# Altium PCB FreshPal PCB.PcbDoc
Units mil, origin at the board's own origin, x right, y up, seen from the top; angles counter-clockwise.
Board outline 2555 x 1245 mil, 2 copper layers (Top Layer, Bottom Layer); 40 components, 27 nets, 226 pads, 61 vias.
Unrouted connection lines stored in the file: 2.
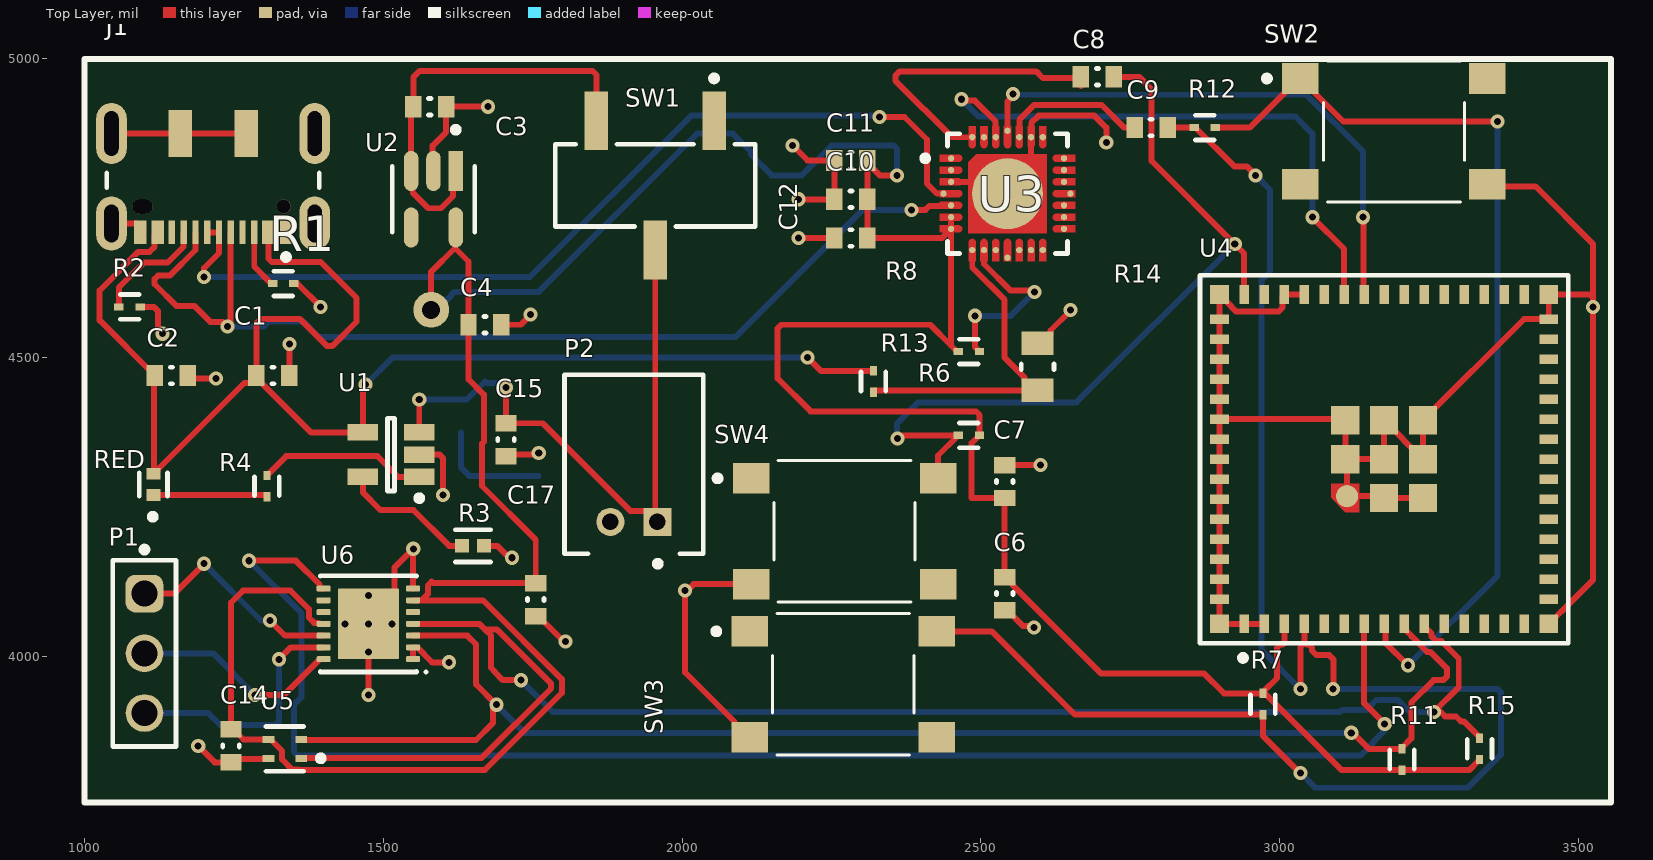
[diagram p0: Top Layer view]
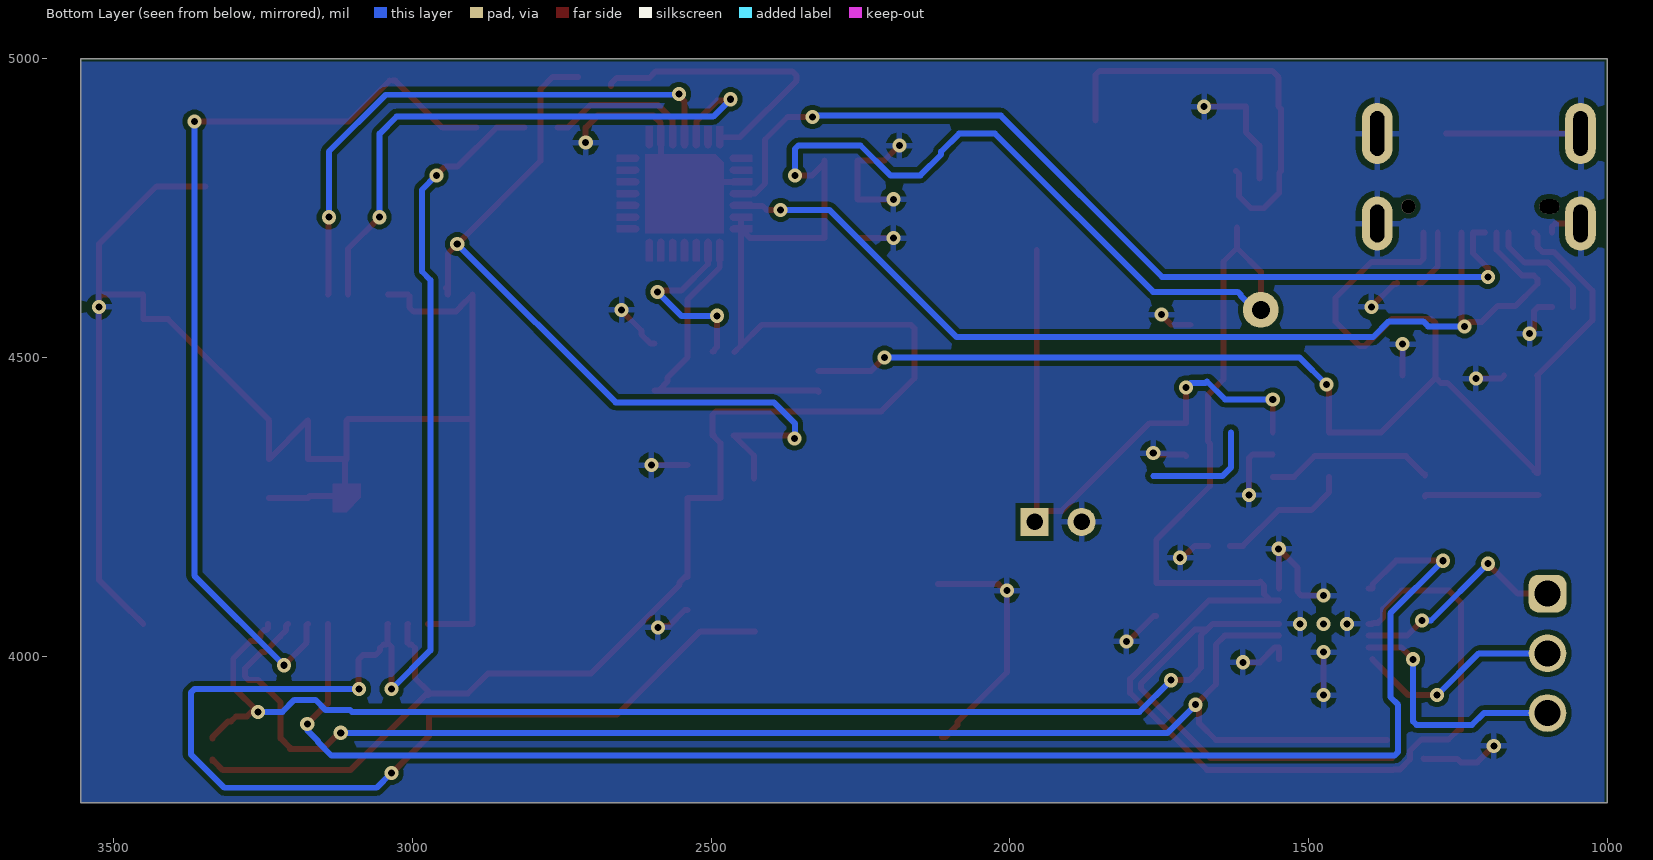
[diagram p1: Bottom Layer view, seen from below]
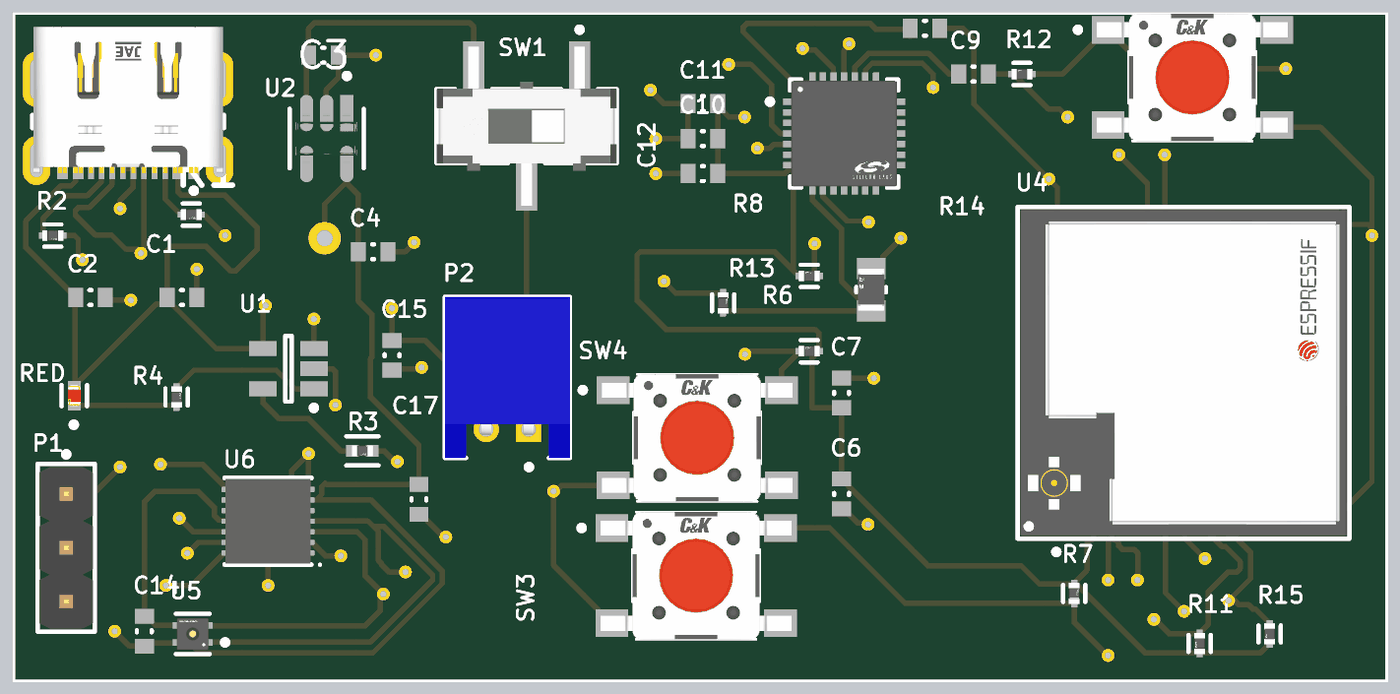
[diagram p2: 3D render of the assembled board from above, using the file's embedded part models]

## Layer stack, top to bottom
Top Solder: solder mask 0.4, Solder Resist, Dk 3.5
Top Layer: signal copper 1.4
Dielectric 1: dielectric 12.6, FR-4, Dk 4.8
Bottom Layer: signal copper 1.4
Bottom Solder: solder mask 0.4, Solder Resist, Dk 3.5

## Board outline
1000,3755 1000,5000 3555,5000 3555,3755

## Design rules (kind name [scope] priority, off if disabled: settings)
Clearance [All] p1: gap=8 ignorepadtopadclearanceinfootprint=FALSE
PolygonConnect [All] p1: connectstyle=Relief reliefconductorwidth=10 reliefentries=4 polygonreliefangle="90 Angle" airgapwidth=10
RoutingVias [All] p1: holewidth=20 width=40 viastyle="Through Hole" minholewidth=8 minwidth=18 maxholewidth=12 maxwidth=24
SolderMaskExpansion [All] p1: expansion=0 istentingtop=FALSE
SupplyNets "Schematic Supply Nets" [InNet('GND')] p1: voltage=0.000
Width [All] p1: maxlimit=10 minlimit=10 preferedwidth=10
30 further rules are at their usual default settings.

## Classes and differential pairs
component class "Frteshpal Schematic": C1 C2 C3 C4 C6 C7 C8 C9 C10 C11 C12 C14 C15 C17 J1 P1 P2 R1 R3 R4 R6 R8 R11 R12 R13 R14 R15 RED SW1 SW3 SW4 U1 U2 U3 U4 U5 U6

## Components (designator, comment, footprint, x,y, rotation, side; value= is the part's Value field where it differs from the comment)
C1 "100nF" CAPC0603(1608)100_L 1315,4470 r0 top value=3.3pF
C2 "10uF" CAPC0603(1608)100_L 1145,4470 r0 top value=3.3pF
C3 "1uF" CAPC0603(1608)100_L 1577.56,4920 r0 top value=3.3pF
C4 "10uF" CAPC0603(1608)100_L 1670,4555 r0 top value=3.3pF
C6 "10uF" CAPC0603(1608)100_L 2540,4105 r270 top value=3.3pF
C7 "100nF" CAPC0603(1608)100_L 2540,4292.56 r90 top value=3.3pF
C8 "100nF" CAPC0603(1608)100_L 2695,4970 r180 top value=3.3pF
C9 "100nF" CAPC0603(1608)100_L 2785,4885 r180 top value=3.3pF
C10 "4.7uF" CAPC0603(1608)100_L 2282.44,4765 r180 top value=3.3pF
C11 "100nF" CAPC0603(1608)100_L 2282.44,4830 r180 top value=3.3pF
C12 "100nF" CAPC0603(1608)100_L 2282.44,4700 r0 top value=3.3pF
C14 "10uF" CAPC0603(1608)100_L 1245,3850 r270 top value=3.3pF
C15 "4.7uF" CAPC0603(1608)100_L 1705,4362.56 r90 top value=3.3pF
C17 "100nF" CAPC0603(1608)100_L 1755,4095 r90 top value=3.3pF
J1 "DX07S016JA1R1500" FP-DX07S016JA1R1500-MFG 1214.88,4835.63 r180 top
P1 "61300311121" 61300311121 1100,4005 r270 top
P2 "S2B-PH-K-S(LF)(SN)" JST-S2B-PH-K-S_V 1919.37,4321.46 r180 top
R1 "5.1k" FP-RN73R1E-MFG 1332.18,4623.86 r0 top
R2 "5.1k" FP-RN73R1E-MFG 1075,4585 r0 top
R3 "2k" FP-RN73R1E-IPC_B 1650,4185 r0 top
R4 "4.7k" FP-RN73R1E-MFG 1305,4285 r90 top
R6 "10k" FP-RN73R1E-MFG 2480,4370 r180 top
R7 "10k" FP-RN73R1E-MFG 2972.01,3920.16 r90 top
R8 "1k" FP-RN73R1E-MFG 2480,4510 r180 top
R11 "4.7k" FP-RN73R1E-MFG 3205,3827.28 r270 top
R12 "10k" FP-RN73R1E-MFG 2875,4885 r180 top
R13 "22.1k" FP-RN73R1E-MFG 2320,4460 r90 top
R14 "47.5k" FP-RN732A-MFG 2595,4484.37 r90 top value=69.8KΩ
R15 "4.7k" FP-RN73R1E-MFG 3335,3845 r270 top
RED "LED 1" FP-SML-P1-MFG 1115,4287.72 r90 top
SW1 "S102011SCQN" FP-JS102011SCQN-MFG 1955,4788.27 r180 top
SW2 "" PTS645SM43SMTR92LFS_MFG 3191.5,4878.58 r0 top
SW3 "PTS645SM43SMTR92LFS" PTS645SM43SMTR92LFS_MFG 2269.78,3953.24 r0 top
SW4 "PTS645SM43SMTR92LFS" PTS645SM43SMTR92LFS_MFG 2271.89,4209.3 r0 top
U1 "MCP73831T-2ACI/OT" SOT-23-OT5_M 1512.76,4337.6 r180 top
U2 "AP2112K-3.3TRG1" FP-SOT25-IPC_A 1583.79,4765.15 r270 top
U3 "CP2102N-A02-GQFN28" FP-CP2102N-A02-GQFN28-MFG 2544.68,4774.49 r0 top
U4 "ESP32-S2-MINI-1U" FP-ESP32-S2-MINI-1U-MFG 3175.04,4330 r90 top
U5 "SHT40-AD1B-R2" FP-SHT40-AD1B-R2-MFG 1335,3845 r180 top
U6 "LMP91000SDX/NOPB" NHL0014B_V 1474.8,4054.37 r180 top

## Footprints (in the part's own frame and the unit in brackets; to place one, negate y for a bottom-side part, rotate by r counter-clockwise, add the part's x,y. Pads: shape width x height; smd on the part's side, far side on the other; paste and mask are expansions set on the pad)
61300311121 [mm] "Pin Header, pitch 2.54 mm, THT, Vertical, single row, 3p"
  rrect50% 1.6x1.6 hole 1.1: 1(-2.54,0)
  round 1.6 hole 1.1: 2(0,0) 3(2.54,0)
  silkscreen extent -4.53,-1.35 3.96,1.35, body extent -3.81,-1.27 3.81,1.27, height 8.57
CAPC0603(1608)100_L [mm] "Chip Capacitor, Body 1.6x0.8mm, Height 1.0mm, IPC High Density"
  rect 0.7x0.9 smd: 1(-0.7,0) 2(0.7,0)
  silkscreen extent -0.05,-0.35 0.05,0.35, body extent -0.87,-0.47 0.88,0.48, height 1
FP-CP2102N-A02-GQFN28-MFG [mm]
  round 0.27 smd paste+0 mask+0: 1(-2.4,1.5) 2(-2.4,1) 3(-2.4,0.5) 4(-2.725,0) 5(-2.4,-0.5) 6(-2.4,-1) 7(-2.4,-1.5) 8(-1.5,-2.4) 9(-1,-2.4) 10(-0.5,-2.4) 11(0,-2.725) 12(0.5,-2.4) 13(1,-2.4) 14(1.5,-2.4) 15(2.4,-1.5) 16(2.4,-1) 17(2.4,-0.5) 18(2.675,0) 19(2.4,0.5) 20(2.4,1) 21(2.4,1.5) 22(1.5,2.4) 23(1,2.4) 24(0.5,2.4) 25(0,2.675) 26(-0.5,2.4) 27(-1,2.4) 28(-1.5,2.4)
  round 3.015 smd paste-1000 mask+0: 29(0,0)
  Top Layer region: -2.875,-0.85 -2.075,-0.85 -2.018,-0.861 -1.969,-0.894 -1.936,-0.943 -1.925,-1 -1.925,-1 -1.936,-1.057 -1.969,-1.106 -2.018,-1.139 -2.075,-1.15 -2.075,-1.15 -2.875,-1.15
  Top Layer region: -2.875,-1.35 -2.075,-1.35 -2.018,-1.361 -1.969,-1.394 -1.936,-1.443 -1.925,-1.5 -1.925,-1.5 -1.936,-1.557 -1.969,-1.606 -2.018,-1.639 -2.075,-1.65 -2.075,-1.65 -2.875,-1.65
  Top Layer region: -0.35,2.875 -0.35,2.075 -0.361,2.018 -0.394,1.969 -0.443,1.936 -0.5,1.925 -0.5,1.925 -0.557,1.936 -0.606,1.969 -0.639,2.018 -0.65,2.075 -0.65,2.075 -0.65,2.875
  Top Layer region: 1.15,2.875 1.15,2.075 1.139,2.018 1.106,1.969 1.057,1.936 1,1.925 1,1.925 0.943,1.936 0.894,1.969 0.861,2.018 0.85,2.075 0.85,2.075 0.85,2.875
  Top Layer region: -1.675,1.325 -1.325,1.675 1.675,1.675 1.675,-1.675 -1.675,-1.675
  Top Layer region: -2.875,0.65 -2.075,0.65 -2.018,0.639 -1.969,0.606 -1.936,0.557 -1.925,0.5 -1.925,0.5 -1.936,0.443 -1.969,0.394 -2.018,0.361 -2.075,0.35 -2.075,0.35 -2.875,0.35
  Top Layer region: 0.15,2.875 0.15,2.075 0.139,2.018 0.106,1.969 0.057,1.936 0,1.925 0,1.925 -0.057,1.936 -0.106,1.969 -0.139,2.018 -0.15,2.075 -0.15,2.075 -0.15,2.875
  Top Layer region: 0.65,2.875 0.65,2.075 0.639,2.018 0.606,1.969 0.557,1.936 0.5,1.925 0.5,1.925 0.443,1.936 0.394,1.969 0.361,2.018 0.35,2.075 0.35,2.075 0.35,2.875
  Top Layer region: -1.35,2.875 -1.35,2.075 -1.361,2.018 -1.394,1.969 -1.443,1.936 -1.5,1.925 -1.5,1.925 -1.557,1.936 -1.606,1.969 -1.639,2.018 -1.65,2.075 -1.65,2.075 -1.65,2.875
  Top Layer region: -1.65,-2.875 -1.65,-2.075 -1.639,-2.018 -1.606,-1.969 -1.557,-1.936 -1.5,-1.925 -1.5,-1.925 -1.443,-1.936 -1.394,-1.969 -1.361,-2.018 -1.35,-2.075 -1.35,-2.075 -1.35,-2.875
  Top Layer region: -2.875,0.15 -2.075,0.15 -2.018,0.139 -1.969,0.106 -1.936,0.057 -1.925,0 -1.925,0 -1.936,-0.057 -1.969,-0.106 -2.018,-0.139 -2.075,-0.15 -2.075,-0.15 -2.875,-0.15
  Top Layer region: -2.875,-0.35 -2.075,-0.35 -2.018,-0.361 -1.969,-0.394 -1.936,-0.443 -1.925,-0.5 -1.925,-0.5 -1.936,-0.557 -1.969,-0.606 -2.018,-0.639 -2.075,-0.65 -2.075,-0.65 -2.875,-0.65
  Top Layer region: -2.875,1.65 -2.075,1.65 -2.018,1.639 -1.969,1.606 -1.936,1.557 -1.925,1.5 -1.925,1.5 -1.936,1.443 -1.969,1.394 -2.018,1.361 -2.075,1.35 -2.075,1.35 -2.875,1.35
  Top Layer region: -2.875,1.15 -2.075,1.15 -2.018,1.139 -1.969,1.106 -1.936,1.057 -1.925,1 -1.925,1 -1.936,0.943 -1.969,0.894 -2.018,0.861 -2.075,0.85 -2.075,0.85 -2.875,0.85
  Top Layer region: 2.875,-1.65 2.075,-1.65 2.018,-1.639 1.969,-1.606 1.936,-1.557 1.925,-1.5 1.925,-1.5 1.936,-1.443 1.969,-1.394 2.018,-1.361 2.075,-1.35 2.075,-1.35 2.875,-1.35
  Top Layer region: 2.875,-1.15 2.075,-1.15 2.018,-1.139 1.969,-1.106 1.936,-1.057 1.925,-1 1.925,-1 1.936,-0.943 1.969,-0.894 2.018,-0.861 2.075,-0.85 2.075,-0.85 2.875,-0.85
  Top Layer region: 2.875,-0.65 2.075,-0.65 2.018,-0.639 1.969,-0.606 1.936,-0.557 1.925,-0.5 1.925,-0.5 1.936,-0.443 1.969,-0.394 2.018,-0.361 2.075,-0.35 2.075,-0.35 2.875,-0.35
  Top Layer region: 2.875,-0.15 2.075,-0.15 2.018,-0.139 1.969,-0.106 1.936,-0.057 1.925,0 1.925,0 1.936,0.057 1.969,0.106 2.018,0.139 2.075,0.15 2.075,0.15 2.875,0.15
  Top Layer region: 2.875,0.35 2.075,0.35 2.018,0.361 1.969,0.394 1.936,0.443 1.925,0.5 1.925,0.5 1.936,0.557 1.969,0.606 2.018,0.639 2.075,0.65 2.075,0.65 2.875,0.65
  Top Layer region: 2.875,0.85 2.075,0.85 2.018,0.861 1.969,0.894 1.936,0.943 1.925,1 1.925,1 1.936,1.057 1.969,1.106 2.018,1.139 2.075,1.15 2.075,1.15 2.875,1.15
  Top Layer region: 2.875,1.35 2.075,1.35 2.018,1.361 1.969,1.394 1.936,1.443 1.925,1.5 1.925,1.5 1.936,1.557 1.969,1.606 2.018,1.639 2.075,1.65 2.075,1.65 2.875,1.65
  Top Layer region: -1.15,-2.875 -1.15,-2.075 -1.139,-2.018 -1.106,-1.969 -1.057,-1.936 -1,-1.925 -1,-1.925 -0.943,-1.936 -0.894,-1.969 -0.861,-2.018 -0.85,-2.075 -0.85,-2.075 -0.85,-2.875
  Top Layer region: -0.65,-2.875 -0.65,-2.075 -0.639,-2.018 -0.606,-1.969 -0.557,-1.936 -0.5,-1.925 -0.5,-1.925 -0.443,-1.936 -0.394,-1.969 -0.361,-2.018 -0.35,-2.075 -0.35,-2.075 -0.35,-2.875
  Top Layer region: -0.15,-2.875 -0.15,-2.075 -0.139,-2.018 -0.106,-1.969 -0.057,-1.936 0,-1.925 0,-1.925 0.057,-1.936 0.106,-1.969 0.139,-2.018 0.15,-2.075 0.15,-2.075 0.15,-2.875
  Top Layer region: 0.35,-2.875 0.35,-2.075 0.361,-2.018 0.394,-1.969 0.443,-1.936 0.5,-1.925 0.5,-1.925 0.557,-1.936 0.606,-1.969 0.639,-2.018 0.65,-2.075 0.65,-2.075 0.65,-2.875
  Top Layer region: 0.85,-2.875 0.85,-2.075 0.861,-2.018 0.894,-1.969 0.943,-1.936 1,-1.925 1,-1.925 1.057,-1.936 1.106,-1.969 1.139,-2.018 1.15,-2.075 1.15,-2.075 1.15,-2.875
  Top Layer region: 1.35,-2.875 1.35,-2.075 1.361,-2.018 1.394,-1.969 1.443,-1.936 1.5,-1.925 1.5,-1.925 1.557,-1.936 1.606,-1.969 1.639,-2.018 1.65,-2.075 1.65,-2.075 1.65,-2.875
  Top Layer region: 1.65,2.875 1.65,2.075 1.639,2.018 1.606,1.969 1.557,1.936 1.5,1.925 1.5,1.925 1.443,1.936 1.394,1.969 1.361,2.018 1.35,2.075 1.35,2.075 1.35,2.875
  Top Layer region: -0.85,2.875 -0.85,2.075 -0.861,2.018 -0.894,1.969 -0.943,1.936 -1,1.925 -1,1.925 -1.057,1.936 -1.106,1.969 -1.139,2.018 -1.15,2.075 -1.15,2.075 -1.15,2.875
  silkscreen extent -3.62,-2.55 2.55,2.55, body extent -2.98,-2.98 2.98,2.98, height 0.25
FP-DX07S016JA1R1500-MFG [mm]
  rrect100% 1.3x2.3 hole 1.6 slot 0.6 at 0 deg paste-2539.97 mask+0: 1(-4.32,2.825) 2(4.32,2.825)
  rrect100% 1.3x2.6 hole 1.9 slot 0.6 at 0 deg paste-2539.97 mask+0: 3(-4.32,-1) 6(4.32,-1)
  rect 1x2 smd paste+0 mask+0: 4(-1.4,-1) 5(1.4,-1)
  rect 0.52x1 smd paste+0 mask+0: A1/B12(-3.1,3.2) A4/B9(-2.35,3.2) A12/B1(3.1,3.2) B4/A9(2.35,3.2)
  rect 0.27x1 smd paste+0 mask+0: A5(-1.75,3.2) A6(-0.25,3.2) A7(0.75,3.2) A8(1.75,3.2) B5(1.25,3.2) B6(0.25,3.2) B7(-0.75,3.2) B8(-1.25,3.2)
  round 0.6 hole 0.6 unplated paste-2539.97 mask+0: ""(-3,2.1)
  rrect100% 0.85x0.6 hole 0.6 slot 0.85 at 0 deg unplated paste-2539.97 mask+0: ""(3,2.1)
  silkscreen extent -4.52,0.67 4.52,4.37, body extent -5.07,-3.75 5.07,4.08, height 0.25
FP-ESP32-S2-MINI-1U-MFG [mm]
  rect 0.8x0.4 smd paste+0 mask+0: 1(-7,5.95) 2(-7,5.1) 3(-7,4.25) 4(-7,3.4) 5(-7,2.55) 6(-7,1.7) 7(-7,0.85) 8(-7,0) 9(-7,-0.85) 10(-7,-1.7) 11(-7,-2.55) 12(-7,-3.4) 13(-7,-4.25) 14(-7,-5.1) 15(-7,-5.95) 31(7,-5.95) 32(7,-5.1) 33(7,-4.25) 34(7,-3.4) 35(7,-2.55) 36(7,-1.7) 37(7,-0.85) 38(7,0) 39(7,0.85) 40(7,1.7) 41(7,2.55) 42(7,3.4) 43(7,4.25) 44(7,5.1) 45(7,5.95)
  rect 0.4x0.8 smd paste+0 mask+0: 16(-5.95,-7) 17(-5.1,-7) 18(-4.25,-7) 19(-3.4,-7) 20(-2.55,-7) 21(-1.7,-7) 22(-0.85,-7) 23(0,-7) 24(0.85,-7) 25(1.7,-7) 26(2.55,-7) 27(3.4,-7) 28(4.25,-7) 29(5.1,-7) 30(5.95,-7) 46(5.95,7) 47(5.1,7) 48(4.25,7) 49(3.4,7) 50(2.55,7) 51(1.7,7) 52(0.85,7) 53(0,7) 54(-0.85,7) 55(-1.7,7) 56(-2.55,7) 57(-3.4,7) 58(-4.25,7) 59(-5.1,7) 60(-5.95,7)
  rect 1.2x1.2 smd paste+0 mask+0: 61(-1.65,-1.65) 61(-1.65,0) 61(0,1.65) 61(0,0) 61(0,-1.65) 61(1.65,-1.65) 61(1.65,0) 61(1.65,1.65)
  round 0.945 smd paste+0 mask+0: 61(-1.575,1.575)
  rect 0.8x0.8 smd paste+0 mask+0: 62(-7,7) 63(-7,-7) 64(7,-7) 65(7,7)
  Top Layer region: -2.25,1.65 -2.25,1.05 -1.05,1.05 -1.05,2.25 -1.65,2.25
  silkscreen extent -8.57,-7.83 7.83,7.83, body extent -7.88,-7.88 7.88,7.88, height 0.25
FP-JS102011SCQN-MFG [mm]
  rect 1x2.5 smd paste+0 mask+0: 1(-2.5,-2.75) 2(0,2.75) 3(2.5,-2.75)
  silkscreen extent -4.25,-4.67 4.25,1.75, body extent -4.35,-4.1 4.35,4.1, height 0.25
FP-RN73R1E-IPC_B [mil]
  rect 23.14x22.54 smd paste+0 mask+0: 1(-18.27,0) 2(18.27,0)
  silkscreen extent -30,-27 30,27, body extent -36,-17 36,17, height 10
FP-RN73R1E-MFG [mm]
  rect 0.4x0.3 smd paste+0 mask+0: 1(-0.45,0) 2(0.45,0)
  silkscreen extent -0.4,-0.53 0.4,0.53, body extent -0.75,-0.38 0.75,0.38, height 0.25
FP-RN732A-MFG [mm]
  rect 1x1.35 smd paste+0 mask+0: 1(-1,0) 2(1,0)
  silkscreen extent -0.13,-0.7 0.13,0.7, body extent -1.6,-0.8 1.6,0.8, height 0.25
FP-SHT40-AD1B-R2-MFG [mm]
  rect 0.5x0.3 smd paste+0 mask+0: 1(-0.7,0.4) 2(-0.7,-0.4) 3(0.7,-0.4) 4(0.7,0.4)
  silkscreen extent -1.65,-0.95 0.8,0.95, body extent -1.05,-0.9 1.05,0.9, height 0.25
FP-SML-P1-MFG [mm]
  rect 0.5x0.6 smd paste+0 mask+0: 1(-0.45,0) 2(0.45,0)
  silkscreen extent -1.5,-0.6 0.5,0.6, body extent -0.8,-0.43 0.8,0.43, height 0.25
FP-SOT25-IPC_A [mm]
  rect 1.707x0.616 smd paste+0 mask+0: 1(-1.201,0.95)
  rrect100% 1.707x0.616 smd paste+0 mask+0: 2(-1.201,0) 3(-1.201,-0.95) 4(1.201,-0.95) 5(1.201,0.95)
  silkscreen extent -3.08,-1.75 1.4,1.75, body extent -2.55,-2 2.55,2, height 0.25
JST-S2B-PH-K-S_V [mm] "THD, 2-Leads, Body 7.6x5.9mm, Pitch 2mm"
  rect 1.2x1.2 hole 0.7: 1(-1,2.45)
  round 1.2 hole 0.7: 2(1,2.45)
  silkscreen extent -2.95,-3.8 2.95,4.35, body extent -2.95,-3.8 2.95,3.8, height 4.8
NHL0014B_V [mm] "SON, 10-Leads, Body 4x4mm, Pitch 0.5mm, Thermal Pad 3x2.6mm, TI Recommend"
  rrect40% 0.6x0.25 smd: 1(-1.9,1.5) 2(-1.9,1) 3(-1.9,0.5) 4(-1.9,0) 5(-1.9,-0.5) 6(-1.9,-1) 7(-1.9,-1.5) 8(1.9,-1.5) 9(1.9,-1) 10(1.9,-0.5) 11(1.9,0) 12(1.9,0.5) 13(1.9,1) 14(1.9,1.5)
  rrect4% 2.6x3 smd paste-1.3: 15(0,0)
  silkscreen extent -2.5,-2.05 2.05,2.1, body extent -2,-2 2,2, height 0.8
PTS645SM43SMTR92LFS_MFG [mm] "Recommended Land Pattern"
  rect 1.55x1.3 smd paste+0 mask+0: 1(-3.975,2.25) 2(3.975,2.25) 3(-3.975,-2.25) 4(3.975,-2.25)
  silkscreen extent -5.52,-3 3,3, body extent -4.5,-3 4.5,3, height 5.3
SOT-23-OT5_M [mm] "SOT23, 5-Leads, Body 2.9x1.7mm, Pitch 0.95mm, Lead Span 2.8mm, IPC Low Density"
  rect 1.3x0.7 smd: 1(-1.2,0.95) 2(-1.2,0) 3(-1.2,-0.95) 4(1.2,-0.95) 5(1.2,0.95)
  silkscreen extent -1.33,-1.55 0.15,1.97, body extent -0.9,-1.55 0.9,1.55, height 1.45

## Part data
C1 C2 C3 C4 C6 C7 C8 C9 C10 C11 C12 C14 C15 C17: library part CMP-1035-00228-1, "CAP 3.3pF 16V ±0.1pF 0603 (1608 Metric) Thickness 1mm SMD", Case-EIA=0603, Case-Metric=1608, Rated Voltage="16 V", Tolerance=Â±0.1pF, Max Thickness="1 mm", Technology=SMT
J1: library part CMP-19038-000003-1, "CONN RCP USB2.0 TYP C 24P SMD RA"
P1: library part CMP-1502-01062-4, "THT Vertical Pin Header WR-PHD, Pitch 2.54 mm, Single Row, 3 pins", Color=Black, Contact Resistance=20mΩ, Current Rating=3A, Max Operating Temperature=105°C, Min Operating Temperature=-40°C, Operating Supply Voltage=250V, Connector Type="Male Pin", Contact Material=Gold, Contact Mating Length=5.9944mm, Contact Plating=Gold, Gender=Male, Height=8.94mm, Lead Free="Lead Free", Lead Pitch=2.54mm, Mount="Through Hole", Number of Contacts=3, Number of Pins=3, Number of Positions=3, Number of Rows=1, Orientation=Vertical, Packaging=Bulk, Pitch=2.54mm, RoHS=Compliant, Termination=Solder, Voltage Rating=250V
P2: library part CMP-1755-00004-1, "Male Header, Pitch 2 mm, 1 x 2 Position, Height 4.8 mm, Tail Length 3.4 mm, -25 to 85 degC, RoHS, Bulk", Capacitance="10 uF", Case\Package=Radial, Max Operating Temperature="85 degC", Min Operating Temperature="-40 degC", Package Quantity=200, Tolerance=20%, Voltage Rating="50 V", ComponentLink1Description=Datasheet, ComponentLink1URL=http://www.jst-mfg.com/product/pdf/eng/ePH.pdf, DatasheetVersion=Dec-12, Diameter="5 mm", Height="11 mm", Lead Pitch="2 mm", Length="11 mm", Mount="Through Hole", PackageDescription="Male Header, Pitch 2 mm, 1 x 2 Position, Height 4.8 mm, Tail Length 3.4 mm", PackageReference=S2B-PH-K-S, Packaging=Bulk, Pins=2, Radiation Hardening=No, REACH SVHC="No SVHC", RoHSCompliant=true, Voltage Rating (DC)="50 V"
R1 R2 R4 R6 R7 R8 R11 R12 R13 R15: library part CMP-04015-057493-1, "5.1kΩ ±0.5% 0.063W, 1/16W Chip Resistor 0402 (1005 Metric) Moisture Resistant Thin Film"
R3: library part CMP-04015-046600-1, "2kΩ ±1% 0.063W, 1/16W Chip Resistor 0402 (1005 Metric) Moisture Resistant Thin Film"
R14: library part CMP-03211-001830-1, "SMD Chip Resistor, Thin Film, 69.8KΩ, 100 V, 0805 [2012 Metric], 100 mW, 0.1%, RN73 Series", Manufacturer="TE Connectivity", Manufacturer Part Number=RN73C2A69K8BTDF, Package=RN732A, Power Rating=0.1W, Resistance=69.8KΩ, Temperature="-55°C to 155°C", Temperature Coefficient=10ppm/°C, Temperature Range High=155°C, Temperature Range Low=-55°C, Tolerance=0.1%, Voltage Rating=100V, Automotive=No, Category=Res, ComponentLink2Description=Datasheet, ComponentLink2URL=https://www.te.com/commerce/DocumentDelivery/DDEController?Action=showdoc&DocId=Data+Sheet%7F1773270%7FP%7Fpdf%7FEnglish%7FENG_DS_1773270_P.pdf%7F1676162-2, Composition="Thin Film", Device Class L1="Passive Components", Device Class L2=Resistors, Device Class L3="Chip SMD Resistors", Height=0.65mm, Ipc Land Pattern Name=RESC200125X55, Lead Free=Yes, Octopart=https://octopart.com/rn73c2a69k8btdf-te+connectivity-42431909, octopart_url=https://octopart.com/rn73c2a69k8btdf-te+connectivity-42431909, Packaging="1000 Reel", RoHS=TRUE, Series=RN73
RED: library part CMP-08952-000003-1, "LED RED CLEAR 1006 SMD", Colour=Red, Forward Current=1mA, Forward Voltage=1.8V, Manufacturer=Rohm, Manufacturer Part Number=SML-P11VTT86R, Package=SML-P1, Power Dissipation=50mW, Reverse Voltage=5V, Temperature="-40°C to +85°C", Temperature Range High=+85°C, Temperature Range Low=-40°C, Automotive=No, Category=Diode, ComponentLink2Description=Datasheet, ComponentLink2URL=https://www.rohm.com/datasheet/SML-P11VT(R)/sml-p11-e, Device Class L1=Optoelectronics, Device Class L2=LEDs, Device Class L3=unset, Digikey Description="LED RED CLEAR 1006 SMD", Height=0.25mm, Lead Free=Yes, Led Orientation="Top View", Luminous Intensity=4mcd, Mouser Description="SML-P11 Series Red 0402 Clear 4 mcd 1.8 V Surface Mount PICOLED? LED", Octopart=https://octopart.com/sml-p11vtt86r-rohm-34112314, RoHS=TRUE, Wavelength=626nm
SW1: library part CMP-10038-000023-1, "SWITCH SLIDE SPDT 300MA 6V", Actuator Color=Black, Case/Package=SMD/SMT, Contact Resistance=70mR, Current Rating=300mA, Max Operating Temperature=85°C, Max Voltage Rating (DC)=30V, Min Operating Temperature=-40°C, Package Quantity=4000, Voltage Rating (DC)=6V, Actuator Length=2mm, Actuator Material=Nylon, Actuator Type=Standard, Contact Material="Copper Alloy", Contact Plating=Silver, Depth=7.5mm, Electrical Life=5000Cycles, Housing Material=Nylon, Length=8.5mm, Max Current Rating=300mA, Mount="Surface Mount", Orientation=Straight, Packaging="Tape and Reel", Radiation Hardening=No, RoHS Compliant=Yes, Series=JS, Switch Function=On-On, Switch Travel=2mm, Termination="Gull Wing", Throw Configuration=SPDT
SW2: library part CMP-2000-05160-3, "Switch Tactile N.O SPST Round Button Gull Wing 0.05A 12VDC 100000Cycle 1.57N SMD T/R", Case/Package=SMD/SMT, Color=Black, Contact Current Rating=50mA, Contact Resistance=100mΩ, Insulation Resistance=100GΩ, Manufacturer Package Identifier=PTS645SM43SMTR92LFS, Max Operating Temperature=60°C, Max Voltage Rating (DC)=12V, Min Operating Temperature=-20°C, Operating Force=1.57N, Actuator Length=850µm, Actuator Material="Nylon, Polyamide", China RoHS=Compliant, ComponentLink1Description="Manufacturer's Website", ComponentLink1URL=http://www.ck-components.com/, ComponentLink2Description="Datasheet URL", ComponentLink2URL=https://www.ckswitches.com/media/1471/pts645.pdf, Contact Material=Silver, Contact Plating=Silver, Current Rating=50mA, Depth=9mm, Electrical Life=100kcycles, Height=3.45mm, HelpURL=https://www.ckswitches.com/media/1471/pts645.pdf, Illumination Type="Illuminated, Non-Illuminated", Lead Free="Lead Free", Length=6mm, Life (Cycles)=100kcycles, Lifecycle Status=Production, Max Current Rating=50mA, Mechanical Life=100kcycles, Mount="Surface Mount", Number of Positions=1, Orientation=Straight, Packaging="Cut Tape (CT)", REACH SVHC=Yes, RoHS=Compliant, Switch Function=Off-Mom, Termination=Solder, Throw Configuration=SPST, Voltage Rating (DC)=12V
SW3 SW4: library part CMP-2000-05160-3, "Switch Tactile N.O SPST Round Button Gull Wing 0.05A 12VDC 100000Cycle 1.57N SMD T/R", Case/Package=SMD/SMT, Color=Black, Contact Current Rating=50mA, Contact Resistance=100mΩ, Insulation Resistance=100GΩ, Max Operating Temperature=60°C, Max Voltage Rating (DC)=12V, Min Operating Temperature=-20°C, Operating Force=1.57N, Actuator Length=850µm, Actuator Material="Nylon, Polyamide", China RoHS=Compliant, ComponentLink1Description="Manufacturer's Website", ComponentLink1URL=http://www.ck-components.com/, ComponentLink2Description="Datasheet URL", ComponentLink2URL=https://www.ckswitches.com/media/1471/pts645.pdf, Contact Material=Silver, Contact Plating=Silver, Current Rating=50mA, Depth=9mm, Electrical Life=100kcycles, Height=3.45mm, HelpURL=https://www.ckswitches.com/media/1471/pts645.pdf, Illumination Type="Illuminated, Non-Illuminated", Lead Free="Lead Free", Length=6mm, Life (Cycles)=100kcycles, Lifecycle Status=Production, Manufacturer Package Identifier=PTS645SM43SMTR92LFS, Max Current Rating=50mA, Mechanical Life=100kcycles, Mount="Surface Mount", Number of Positions=1, Orientation=Straight, Packaging="Cut Tape (CT)", REACH SVHC=Yes, RoHS=Compliant, Switch Function=Off-Mom, Termination=Solder, Throw Configuration=SPST, Voltage Rating (DC)=12V
U1: library part CMP-0133-00142-1, "Miniature Single-Cell, Fully Integrated Li-Ion, Li-Polymer Charge Management Controller, 4.2V, 5-Pin SOT-23, Industrial Temperature, Tape and Reel", Code_IPC=SOT23-5, DatasheetVersion="revE, Sep-2008", PackageDescription="5-Lead Plastic Small Outline Transistor (OT) [SOT-23]", PackageReference=SOT-23-OT5, PackageVersion="revBB, Aug-2009"
U2: library part CMP-12756-000035-1, "IC REG LINEAR 3.3V 600MA SOT25", Case/Package=SOT-23-5, Dropout Voltage=250mV, Max Input Voltage=6V, Max Operating Temperature=85°C, Max Output Current=600mA, Min Input Voltage=2.5V, Min Operating Temperature=-40°C, Output Voltage=3.3V, Package Quantity=1, Quiescent Current=55uA, Accuracy=1.5%, Height=1.3mm, Lead Free="Lead Free", Length=3.1mm, Mount="Surface Mount", Number of Outputs=1, Number of Pins=5, Number of Regulators=1, Output Current=600mA, Output Type=Fixed, Packaging="Tape and Reel", Polarity=Positive, Width=1.7mm
U3: library part CMP-08093-000005-1, "IC USB TO UART BRIDGE QFN28"
U4: library part CMP-194065-000010-1, "SMD MODULE W/IPEX ANT CONNECTOR"
U5: library part CMP-144040-000008-1, "SENSOR HUMIDITY 100 RH SMD"
U6: library part CMP-0064-00202-2, "Configurable AFE Potentiostat for Low-Power Chemical Sensing Applications, 14-pin LLP, 4500 Reel", Manufacturer="Texas Instruments", PackageTopMarking=NS*UZXYTT*L91000, PowerWise=N, ComponentLink1Description="Datasheet URL", ComponentLink1URL=http://www.ti.com/general/docs/lit/getliterature.tsp?genericPartNumber=LMP91000&fileType=pdf, CompType=OtherParts, PackageDescription="LLP, Plastic, Dual, 4 x 4 x 0.8mm Body, 14 Lead, 0.5mm Pitch, No Pullback", PackageReference=NHL0014B, PinCount=14, RoHS=Y

## Free pads (board coordinates)
  round 60 hole 30: 2(1580,4580)

## Via types
v1: diameter 23.62/23.62 (per signal layer), hole 11.81, Top Layer to Bottom Layer, 61 vias

## Nets (pads, with @x,y where several pads share a name; then routed paths per layer and width w, separated by ;. In a path a pad name is that pad's centre, name@x,y a point inside that pad or via, vN(x,y) a via of type N, cw(c..) or ccw(c..) an arc to the next point about the centre after c; other vN are vias at no path point)
GND: C1.2 C2.2 C3.2 C4.2 C6.2 C7.2 C10.2 C11.2 C12.1 C14.2 C15.1 C17.1 J1.1 J1.2 J1.3 J1.4 J1.5 J1.6 J1.A1/B12 J1.A12/B1 P2.2 R1.2 R2.2 R3.2 R14.2 SW2.4 SW3.3 SW4.3 U1.2 U2.2 U3.3 U3.23 U3.29 U4.1 U4.2 U4.30 U4.42 U4.43 U4.46 U4.47 U4.48 U4.49 U4.50 U4.51 U4.52 U4.53 U4.54 U4.55 U4.56 U4.57 U4.58 U4.59 U4.60 U4.61 U4.62 U4.63 U4.64 U4.65 U5.4 U6.1 U6.2 U6.7 U6.15 | length 5639.7
  Top Layer w10: J1.2 1044.88,4724.33 1087.6,4724.33 1092.83,4719.09 J1.A12/B1 ; J1.6 J1.5 J1.4 ; R2.2 1115.59,4585 1122.35,4578.24 1122.35,4547.65 v1(1130,4540) ; C2.2 1177.56,4465 v1(1220,4465) ; v1(1190,3850) 1217.56,3822.44 C14.2 1250.91,3828.35 1306.54,3828.35 U5.4 ; C1.2 v1(1342.56,4522.56) ; R1.2@1351.65,4624.76 1351.65,4624.07 1352.77,4622.95 1357.05,4622.95 v1(1395,4585) ; v1(1474.8,4007.13) 1475,4006.93 v1(1475,3935) ; v1(1474.8,4101.61) 1512.13,4101.61 1518.94,4108.43 1518.94,4148.94 v1@1549.8,4179.8 ; U6.1 U6.2 1556.34,4015 1581.34,3990 v1(1610,3990) ; U6.7 1549.72,4113.43 1549.8,4113.5 v1@1549.8,4179.8 ; v1(1550,4180) v1@1549.8,4179.8 ; U1.2 1594.14,4337.6 1600,4331.74 v1(1600,4270) ; U2.2@1582.4,4799.53 1582.4,4854.72 1605.12,4877.43 C3.2 v1(1675,4920) ; R3.2 1690.66,4185 1710.66,4165 v1(1715,4165) ; C4.2 1730,4555 v1@1745,4570 ; C15.1 1707.5,4337.5 1757.5,4337.5 v1(1760,4340) ; C17.1 1758.94,4067.44 1801.38,4025 v1(1805,4025) ; SW3.3 2108.36,3864.66 2087.77,3885.25 2087.77,3890.17 2005,3972.94 v1(2005,4110) 2008.69,4110 2019.4,4120.72 SW4.3 SW4.3@2120,4120.72 ; v1(2185,4855) 2210,4830 C11.2 C10.2 v1(2195,4765) ; v1(2195,4700) C12.1 ; U3.3 2525,4794.17 U3.29 ; C6.2 2543.94,4077.44 2570.44,4050.94 2586.54,4050.94 v1(2589.14,4048.33) ; C7.2 2589.88,4320.12 v1@2590,4320 ; U3.29@2559.06,4794.06 2583.86,4818.86 U3.23@2583.86,4868.86 ; U3.23@2584.64,4868.86 2584.64,4892.94 2596.69,4905 2690,4905 2710,4885 v1(2710,4860) ; R14.2 2601.89,4523.74 2616.57,4538.43 2616.57,4545.31 2650,4578.74 v1(2650,4580) ; U4.65 U4.46 U4.47 U4.48 U4.49 U4.50 U4.51 ; U4.65 2919.91,4585.13 2919.91,4584.46 2927.53,4576.84 2998.28,4576.84 3004.96,4583.52 3004.96,4602.83 U4.43 U4.42 ; U4.2 U4.1 U4.62 U4.60 U4.59 U4.58 U4.57 U4.56 U4.55 U4.54 U4.53 U4.52 U4.51 ; U4.61@3240,4265.04 3175.04,4265.04 3172.09,4267.99 3113.03,4267.99 3113.03,4327.05 U4.61@3110.08,4330 ; SW2.4@3346.5,4786.42 3428.58,4786.42 3525,4690 3525,4599.73 ; U4.63 3471.09,4074.87 3471.76,4074.87 3525,4128.11 v1(3525,4585) 3525,4599.73 ; U4.51 3108.11,4396.93 3110.08,4394.96 U4.61@3110.08,4330 ; U4.61@3110.08,4330 3175.04,4330 3175.04,4394.96 3240,4330 3240,4394.96 3409.29,4564.25 U4.30 U4.64 3519.14,4605.59 3525,4599.73
  other v1: 1435.43,4054.37 1474.8,4054.37 1514.17,4054.37 2600,4320 1746.16,4572.11
NetC1_1: C1.1 C2.1 J1.A4/B9 J1.B4/A9 R13.2 RED.2 U1.4 | length 2458.2
  Top Layer w10: RED.2@1116.22,4306.65 1118.19,4306.65 1121.81,4310.28 1121.81,4312.24 1267.15,4457.58 1278.66,4457.58 1287.44,4466.36 1287.44,4557.44 1295,4565 1360,4565 1405.86,4519.14 1414.14,4519.14 1455,4560 1455,4600 1395,4660 1313.26,4660 1307.4,4665.86 J1.A4/B9 ; RED.2@1116.22,4310.28 C2.1@1116.22,4468.78 ; C2.1 1025,4562.44 1025,4612.28 1089.68,4676.96 1108.46,4676.96 1117.13,4685.63 1117.13,4704.41 J1.B4/A9 ; C1.1@1287.44,4466.06 1378.5,4375 U1.4 1465.51,4450.51 v1(1470,4455) ; v1(2210,4500) 2232.28,4477.72 R13.2
  Bottom Layer w10: v1(1470,4455) 1515,4500 v1(2210,4500)
NetC3_1: C3.1 SW1.3 U2.1 U2.3 | length 717.2
  Top Layer w10: U2.1 1616.48,4807.71 1616.48,4770.19 1596.3,4750 1575,4750 1549.12,4775.88 1549.12,4809.69 U2.3 1546.39,4916.39 C3.1 1550,4969.14 1560.86,4980 1850,4980 1856.57,4973.43 SW1.3
NetC4_1: C4.1 C6.1 C7.1 C10.1 C11.1 C12.2 C14.1 C17.2 pad.2 R6.1 R7.2 R8.2 R11.2 R15.2 U2.5 U3.6 U3.7 U4.3 U5.3 U6.6 U6.11 | length 6085.6
  Top Layer w10: U6.11 1393.27,4054.37 1391.5,4056.13 1383.96,4056.13 1375.19,4064.9 1375.19,4079.18 1344.37,4110 1265,4110 1245,4090 C14.1 1248.94,3877.56 1265.75,3860.75 U5.3 1311.38,3860.75 1330.28,3841.84 1330.28,3827.39 1347.33,3810.35 1357.84,3810.35 1358.19,3810 1670,3810 1798.63,3938.63 1798.63,3961.83 1666.72,4093.74 U6.6 ; 1565.65,4095.5 1574.42,4104.27 1574.42,4118.55 1580.87,4125 1583.31,4122.56 C17.2 1755,4195 1665,4285 1665,4356.26 1668,4359.26 1668,4437.99 1642.44,4463.55 C4.1 1642.44,4660.88 1619.8,4683.52 ; pad.2 1580,4643.71 1619.8,4683.52 ; U2.5@1619.8,4717.89 1619.8,4683.52 ; C11.1 C11.1@2310,4826.06 ; v1(2360,4805) 2331.06,4805 C11.1@2310,4826.06 ; U3.6@2450,4735 U3.7@2450,4715.31 ; R8.2@2461.3,4509.02 2450,4520.31 ; R7.2 2907.13,3937.87 2873.43,3971.57 2700.99,3971.57 2552.72,4119.84 2552.72,4123.78 2543.94,4132.56 C6.1 C7.1 2484.68,4265 2484.68,4356.97 2494.84,4367.13 2494.84,4369.09 2495.75,4370 R6.1 2497.72,4404.14 2491.86,4410 2215,4410 2160,4465 2160,4549.14 2165.86,4555 2415.32,4555 2450,4520.31 ; R7.2@2972.92,3935 2978.59,3935 3104.02,3809.57 R11.2 3317.28,3809.57 3332.13,3824.41 3334.09,3824.41 3335,3825.32 R15.2 ; R7.2@2972.92,3940.75 2995.68,3963.51 2995.68,4013.95 3001.54,4019.8 3005.39,4019.8 3008.27,4022.68 3008.27,4053.86 U4.3 ; C11.1@2310,4826.06 C10.1 C12.2 2434.68,4700 U3.7@2450,4715.31 ; 2450,4520.31 U3.7@2450,4715.31
  Bottom Layer w10: pad.2 1590,4580 1612.93,4602.93 1612.93,4604.26 1618.79,4610.11 1760.11,4610.11 2025,4875 2085,4875 2115,4845 2115,4840 2150,4805 2200,4805 2250,4855 2354.14,4855 2360,4849.14 v1(2360,4805)
NetC8_1: C8.1 R6.2 SW4.2 U4.45 | length 1394.9
  Top Layer w10: v1(2360.65,4364.58) 2364.34,4364.58 2369.76,4370 R6.2@2460.32,4370 ; SW4.2 2428.39,4336.1 2459.41,4367.13 2459.41,4369.09 R6.2@2460.32,4370 ; R6.2 R6.2@2460.32,4370 ; C8.1 2765,4970 2785.78,4949.22 2785.78,4829.22 v1(2925,4690) 2940.79,4674.21 U4.45 ; U4.45@2941.34,4605.59 2941.34,4614.02 U4.45@2943.66,4616.34
  Bottom Layer w10: v1@2360,4365 2360,4390 2395,4425 2660,4425 v1(2925,4690)
NetC8_2: C8.2 U3.28 | length 501.8
  Top Layer w10: U3.28@2485.43,4868.86 2451.89,4868.86 2357.02,4963.73 2357.02,4972.02 2364.25,4979.25 2592.57,4979.25 2604.1,4967.72 2658.66,4967.72 2667.44,4958.94 C8.2@2667.44,4955
NetC9_1: C9.1 R7.1 R12.2 SW3.2 U4.4 | length 2792.7
  Top Layer w10: SW3.2 2518.18,4041.82 2657.56,3902.44 R7.1 2972.01,3867.01 3034.02,3805 v1(3035,3805) ; C9.1 R12.2 2859.25,4885 2924.25,4820 2945,4820 v1(2960,4805) ; v1(3035,3945) 3035,4015.94 3041.73,4022.68 ; U4.4 3041.73,4053.86 3041.73,4022.68 ; v1(3089.46,3945) 3090,3945.54 3090,3995 3083.2,4001.8 3061.94,4001.8 3054.32,4009.42 3054.32,4013.95 3048.47,4019.8 3044.61,4019.8 3041.73,4022.68
  Bottom Layer w10: v1(2960,4805) 2984.13,4780.87 2984.13,4644.13 2970,4630 2970,4010 v1(3035,3945) ; v1(3035,3805) 3060,3780 3315,3780 3371.04,3836.04 3371.04,3939.14 3365.18,3945 v1(3089.46,3945)
NetC9_2: C9.2 U3.24 | length 248.5
  Top Layer w10: U3.24@2564.17,4868.86 2564.37,4869.06 2564.37,4898.13 2589.24,4923 2702,4923 2740,4885 C9.2
NetC15_2: C15.2 P2.1 SW1.2 U1.3 | length 1244.7
  Top Layer w10: U1.3 v1(1560,4430) ; v1(1705,4450) C15.2 1766.67,4390.12 1913.17,4243.62 1940.12,4243.62 P2.1@1955,4228.74 ; SW1.2 P2.1@1955,4228.74 ; P2.1 P2.1@1955,4228.74
  Bottom Layer w10: v1(1560,4430) 1640,4430 1670,4460 1672.35,4457.65 1697.35,4457.65 v1(1705,4450) ; 1630,4375 1630,4315.86 1643.86,4302 1760,4302
NetJ1_A5: J1.A5 R1.1 | length 99.7
  Top Layer w10: J1.A5 1283.78,4652.58 1312.5,4623.86 R1.1
NetJ1_A6: J1.A6 J1.B6 U3.4 | length 1549.9
  Top Layer w10: v1(1200,4635) 1200,4650 1224.72,4674.72 J1.A6 J1.B6 ; v1(2330.33,4902.77) 2372.23,4902.77 2410,4865 2410,4791.06 2426.58,4774.49 U3.4
  Bottom Layer w10: v1(1200,4635) 1745,4635 2015,4905 v1@2330,4905
NetJ1_A7: J1.A7 J1.B7 U3.5 | length 1755.8
  Top Layer w10: J1.A7 1185.35,4680.18 1142.45,4637.27 1122.73,4637.27 1116.87,4631.41 1116.87,4623.13 1153.98,4586.02 1183.98,4586.02 1210.15,4559.85 1231.06,4559.85 v1(1238.71,4552.2) ; v1@1240.45,4550.45 1244.09,4554.09 1244.09,4709.33 J1.B7 ; v1(2383.66,4747.24) 2407.24,4747.24 2414.02,4754.02 2449.25,4754.02 2450.03,4754.8 U3.5
  Bottom Layer w10: v1(1238.71,4552.2) 1299.74,4552.2 1308.1,4560.56 1365.7,4560.56 1392.15,4534.11 2089.11,4534.11 2302.24,4747.24 v1(2383.66,4747.24)
NetJ1_B5: J1.B5 R2.1 | length 192.8
  Top Layer w10: R2.1 1057.28,4617.28 1098.96,4658.96 1138.68,4658.96 1165.35,4685.63 1165.35,4709.33 J1.B5
NetP1_1: P1.1 U6.12 | length 370.5
  Top Layer w10: P1.1 1150,4105 v1(1200,4155) ; v1(1310,4060) 1335.31,4034.69 U6.12
  Bottom Layer w10: v1(1200,4155) 1295,4060 v1(1310,4060)
NetP1_2: P1.2 U6.14 | length 347.1
  Top Layer w10: v1(1285,3935) 1332.95,3935 U6.14@1393.19,3995.24
  Bottom Layer w10: P1.2 1215,4005 v1(1285,3935)
NetP1_3: P1.3 U6.13 | length 423.1
  Top Layer w10: v1(1325,3995) 1345,4015 U6.13
  Bottom Layer w10: P1.3 1206.74,3905 1226.74,3885 1319.14,3885 1325,3890.86 v1(1325,3995)
NetR3_1: R3.1 U1.5 | length 229
  Top Layer w10: U1.5 1465.51,4274.49 1495,4245 1550,4245 1610,4185 R3.1
NetR4_1: R4.1 RED.1 | length 192.2
  Top Layer w10: RED.1 1304.09,4270 1305,4269.09 R4.1
NetR4_2: R4.2 U1.1 | length 283.9
  Top Layer w10: R4.2 1305,4304.69 1305.91,4305.59 1307.87,4305.59 1337.28,4335 1490,4335 1524.8,4300.2 U1.1
NetR8_1: R8.1 U3.9 | length 308.3
  Top Layer w10: v1(2490,4570) 2490,4517.72 2494.84,4512.87 2494.84,4510.91 2495.75,4510 R8.1 ; U3.9 2505.31,4656.69 2550,4612.01 2587.99,4612.01 v1(2590,4610)
  Bottom Layer w10: v1(2490,4570) 2550,4570 v1(2590,4610)
NetR11_1: R11.1 U4.9 U5.2 U6.3 | length 2415.9
  Top Layer w10: U5.2@1368.33,3860 1655,3860 1683.2,3888.2 1683.2,3913.2 v1(1688.99,3918.99) 1655,3952.98 1655,4020 1640.39,4034.61 1549.68,4034.61 U6.3 ; v1(3120,3872) 3122.57,3872 3149.57,3845 R11.1 3205,3846.97 3220.65,3862.61 3220.65,3922.74 3257.91,3960 3274.14,3960 3280,3965.86 3280,3980 3252.5,4007.5 3246.87,4007.5 3221.09,4033.28 3221.09,4033.94 3211.38,4043.66 3211.38,4051.54 U4.9
  Bottom Layer w10: v1(1688.99,3918.99) 1735.98,3872 v1(3120,3872)
NetR12_1: R12.1 SW2.1 U4.8 | length 1586.4
  Top Layer w10: R12.1 2950,4885 3028.58,4963.58 SW2.1@3033.5,4963.58 ; SW2.1@3038.43,4963.58 3107.01,4895 v1(3365,4895) ; U4.8 3177.16,4052.29 3177.16,4022.84 v1(3215,3985)
  Bottom Layer w10: v1(3215,3985) 3365,4135 v1(3365,4895)
NetR13_1: R13.1 R14.1 U3.8 | length 554.6
  Top Layer w10: R13.1 2320,4444.09 2320.91,4445 R14.1@2588.11,4445 ; U3.8 2485.63,4650.92 2540,4596.55 2540,4500 2573.43,4466.57 2573.43,4459.69 R14.1@2588.11,4445 ; R14.1 R14.1@2588.11,4445
NetR15_1: R15.1 U4.10 U5.1 U6.4 | length 2733.4
  Top Layer w10: U5.1@1359.93,3830 1664.54,3830 1780.63,3946.09 1780.63,3954.37 1690.31,4044.69 1670.31,4044.69 ; U6.4 1660.63,4054.37 1670.31,4044.69 ; v1(1730,3960) 1700,3960 1685,3975 1685.86,3975 1680,3980.86 1680,4035 1670.31,4044.69 ; U4.10 3241.97,4046.54 3244.84,4043.66 3248.7,4043.66 3254.56,4037.8 3254.56,4033.28 3262.17,4025.66 3270.72,4025.66 3300,3996.38 3300,3948.35 v1(3258.65,3907) ; v1@3264.06,3912.41 3277.12,3899.35 3295.46,3899.35 3303.65,3891.16 3308.53,3891.16 3335,3864.68 R15.1
  Bottom Layer w10: v1(1730,3960) 1783,3907 3101.26,3907 3104.26,3910 3145.36,3910 3162.36,3927 3197.62,3927 3217.62,3907 v1(3258.65,3907)
NetU3_25: U3.25 U4.39 | length 931.6
  Top Layer w10: U3.25@2544.49,4879.69 2544.56,4879.76 2544.56,4880.37 2544.49,4880.45 2544.49,4928.58 2553.75,4937.84 v1(2553.75,4941.25) ; v1(3140,4735) 3140.79,4734.21 3140.79,4606.38 U4.39
  Bottom Layer w10: v1(2553.75,4941.25) 2555,4940 3045,4940 3140,4845 v1(3140,4735)
NetU3_26: U3.26 U4.40 | length 1001.8
  Top Layer w10: v1(2467.5,4932.5) 2470,4930 2490,4930 2524.8,4895.2 U3.26@2524.8,4868.86 ; v1(3055,4735) 3108.11,4681.89 U4.40
  Bottom Layer w10: v1(2467.5,4932.5) 2496.75,4903.25 3026.75,4903.25 3055,4875 v1(3055,4735)
NetU4_7: U4.7 U6.8 | length 2549.7
  Top Layer w10: v1(1275,4160) 1353.43,4160 1393.19,4120.24 1393.19,4113.5 1393.27,4113.43 U6.8 ; U4.7 3141.57,3921.41 v1(3176.04,3886.94)
  Bottom Layer w10: v1(1275,4160) 1363,4072 1363,3931.87 1350,3918.87 1350,3840 1356,3834 3135.74,3834 3158,3856.26 3158,3858.08 3176.04,3876.12 v1(3176.04,3886.94)
pads on no net: J1. J1.A8 J1.B8 SW1.1 SW2.2 SW2.3 SW3.1 SW3.4 SW4.1 SW4.4 U2.4 U3.1 U3.2 U3.10 U3.11 U3.12 U3.13 U3.14 U3.15 U3.16 U3.17 U3.18 U3.19 U3.20 U3.21 U3.22 U3.27 U4.5 U4.6 U4.11 U4.12 U4.13 U4.14 U4.15 U4.16 U4.17 U4.18 U4.19 U4.20 U4.21 U4.22 U4.23 U4.24 U4.25 U4.26 U4.27 U4.28 U4.29 U4.31 U4.32 U4.33 U4.34 U4.35 U4.36 U4.37 U4.38 U4.41 U4.44 U6.5 U6.9 U6.10

## Polygon pours and split planes (outlines as drawn)
GND on Bottom Layer "GND_L02_P000" (solid, remove dead copper, pour order 0): 3555,4995 3555,3755 1005,3755 1005,4995

## Silkscreen, mask and mechanical layers (free items; w line width, h text height)
Top Overlay:
  the board outline again, w10